# EAGLE board GPS_radiologger_v4 (EAGLE 9.5.1)
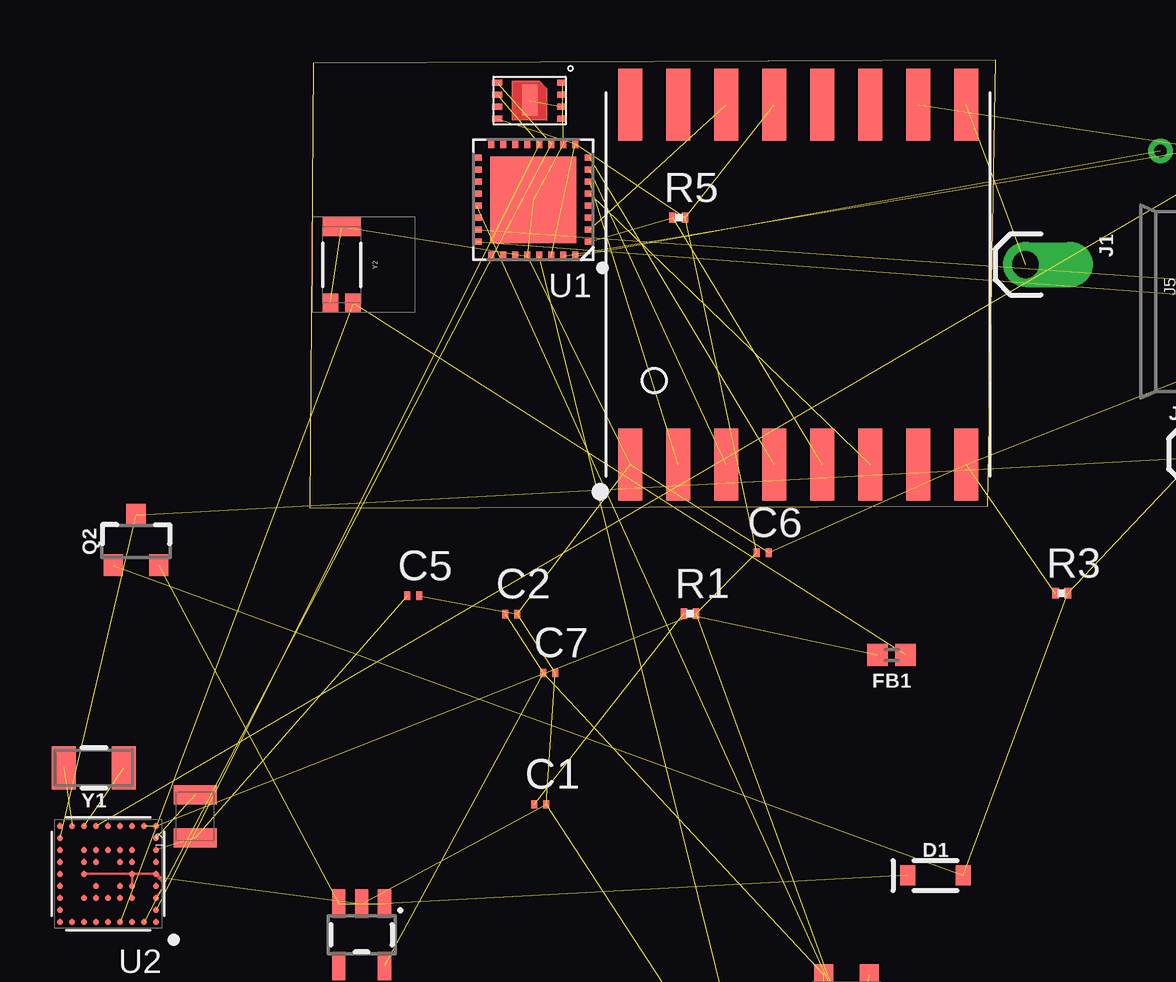
[diagram p0: board, top side]
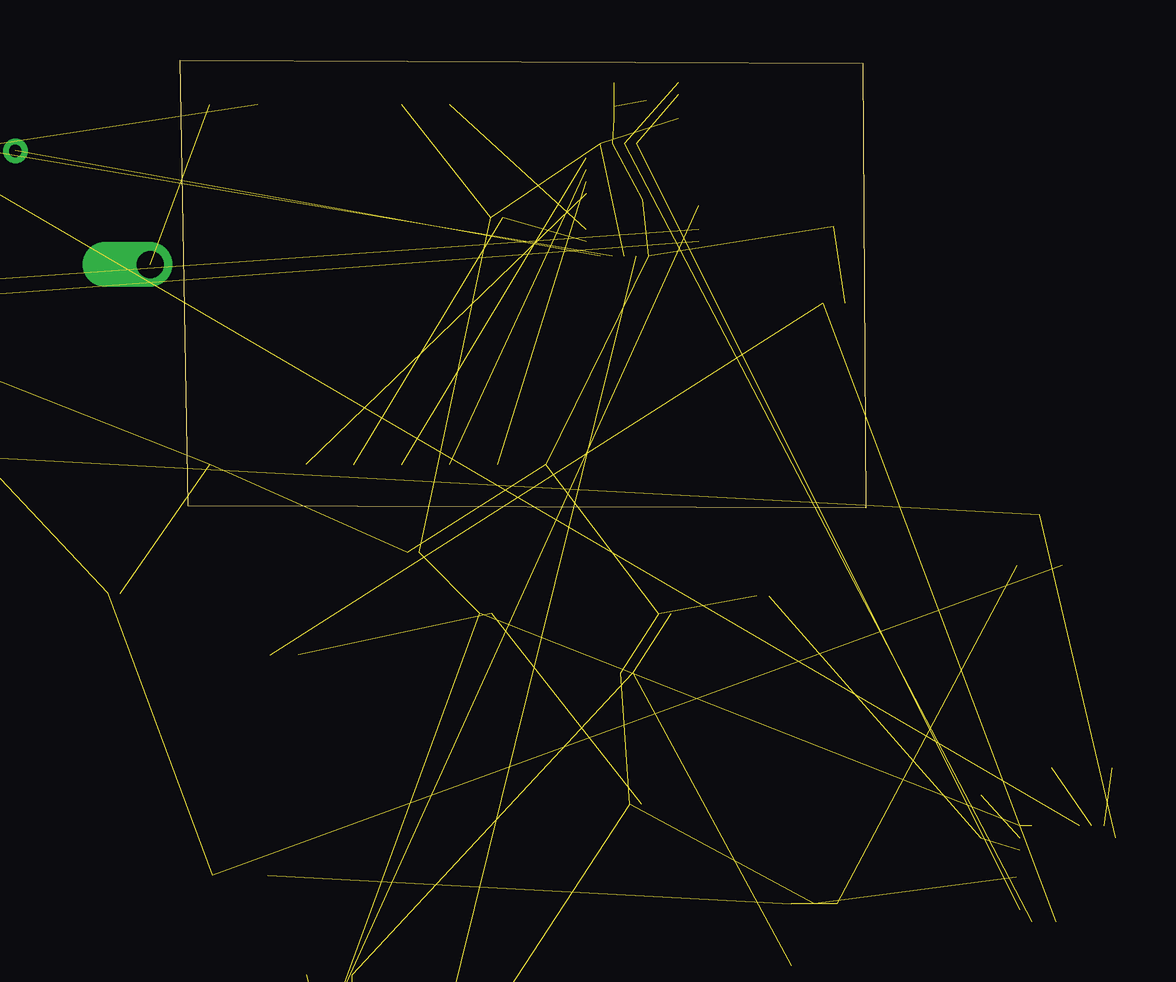
[diagram p1: board, bottom side, seen from below]

Size 28.57 x 18.67 mm. Coordinates in mm from the lower left corner, seen from the top.
Outline: 0,0 28.24,0.07 28.57,18.67 0.14,18.54 0,0
Copper layers (1*16): Top 0.035mm / dielectric 1.5mm / Bottom 0.035mm
Design rules "default *": minimum track width 4mil, minimum drill 0.35mm, track to track 5mil, track to pad 5mil, pad to pad 5mil, via to via 5mil, smd to smd 5mil, copper to edge 20mil, drill to drill 3mil, minimum pad ring 10mil, minimum via ring 8mil, stop-mask expansion 4mil, vias tented up to drill 0mil, thermal gap 10mil
Net classes: 1 vcc: width 0 mm

## Footprints (pad centres in the part's own frame; a part is rotated, then mirrored left to right if it is on the bottom)
C0201 = smd 0.25 x 0.35: 1 -0.25,0; 2 0.25,0
SOD-323 = smd 0.63 x 0.83: A 1.15,0; C -1.15,0
0402 = smd 0.85 x 0.9: 1 -0.58,0; 2 0.58,0
1X01_OFFSET = drill 1.118 pad 1.88 offset: 1 0,0
1X02 = drill 1.016 pad 1.88: 1 0,0; 2 2.54,0
1X04_1.27MM_NO_SILK = drill 0.508 pad 1: 1 0,0; 2 1.27,0; 3 2.54,0; 4 3.81,0
USB-MICROB-PTH-MILL = smd 0.4 x 1.75: D+ 0,0; D- -0.65,0; GND 1.3,0; ID 0.65,0; VBUS -1.3,0 | smd 2 x 1.46: SHIELD -2.9,0.275; SHIELD2 2.9,0.275 | smd 1.425 x 2.5: SHIELD3 -0.963,-2.675; SHIELD4 0.963,-2.675 | smd 1.4 x 2.1 bottom: SHIELD5 -2.731,-2.531; SHIELD7 2.729,-2.531 | smd 1 x 1: SHIELD6 2.7,-2.575 | smd 1.1 x 1.5: SHIELD8 -2.731,-2.731 | smd 1 x 1.3 bottom: SHIELD9 -2.43,0.195; SHIELD10 2.43,0.195
0806 = smd 0.8 x 1.8: 1 -0.9,0; 2 0.9,0
SOT23-3 = smd 0.8 x 0.9: 1 -0.95,-1; 2 0.95,-1; 3 0,1.1
R0201 = smd 0.28 x 0.43: 1 -0.255,0; 2 0.255,0
R0603 = smd 1 x 1.1: 1 -0.85,0; 2 0.85,0
QFN-32_SAMD = smd 0.25 x 0.4: GND 0.21,2.31; GNDANA -1.29,-2.39; PA08 -0.79,-2.39; PA09 -0.29,-2.39; PA10 0.21,-2.39; PA11 0.71,-2.39; PA14 1.21,-2.39; PA15 1.71,-2.39; PA27 1.71,2.31; PA28 0.71,2.31; PA30 -1.29,2.31; PA31 -1.79,2.31; RES 1.21,2.31; VDD -1.79,-2.39; VDDCORE -0.29,2.31; VDDIN -0.79,2.31 | smd 0.4 x 0.25: PA00 -2.39,1.71; PA01 -2.39,1.21; PA02 -2.39,0.71; PA03 -2.39,0.21; PA04 -2.39,-0.29; PA05 -2.39,-0.79; PA06 -2.39,-1.29; PA07 -2.39,-1.79; PA16 2.31,-1.79; PA17 2.31,-1.29; PA18 2.31,-0.79; PA19 2.31,-0.29; PA22 2.31,0.21; PA23 2.31,0.71; PA24 2.31,1.21; PA25 2.31,1.71 | smd 3.6 x 3.6: PAD -0.04,-0.04
UBLOX_ZOE_M8-0-10 = smd 0.25 x 0.25: 1 -1.996,2.004; 2 -1.496,2.004; 3 -0.996,2.004; 4 -0.496,2.004; 5 0.004,2.004; 6 0.504,2.004; 7 1.004,2.004; 8 1.504,2.004; 9 2.004,2.004; 10 2.004,1.504; 11 2.004,1.004; 12 2.004,0.504; 13 2.004,0.004; 14 2.004,-0.496; 15 2.004,-0.996; 16 2.004,-1.496; 17 2.004,-1.996; 18 1.504,-1.996; 19 1.004,-1.996; 20 0.504,-1.996; 21 0.004,-1.996; 22 -0.496,-1.996; 23 -0.996,-1.996; 24 -1.496,-1.996; 25 -1.996,-1.996; 26 -1.996,-1.496; 27 -1.996,-0.996; 28 -1.996,-0.496; 29 -1.996,0.004; 30 -1.996,0.504; 31 -1.996,1.004; 32 -1.996,1.504; 33 -0.996,1.004; 34 -0.496,1.004; 35 0.004,1.004; 36 0.504,1.004; 37 1.004,1.004; 38 1.004,0.004; 39 1.004,-0.496; 40 1.004,-0.996; 41 0.504,-0.996; 42 0.004,-0.996; 43 -0.496,-0.996; 44 -0.996,-0.996; 45 -0.996,-0.496; 46 -0.996,0.004; 47 -0.996,0.504; 48 -0.496,0.504; 49 0.504,0.504; 50 0.504,-0.496; 51 -0.496,-0.496
SOT23-6 = smd 0.55 x 1.35: 1 -0.95,-1.375; 2 0,-1.375; 3 0.95,-1.375; 4 0.95,1.375; 5 0,1.375; 6 -0.95,1.375
RFM95/96/97/98W = smd 3 x 1: 3.3V 7.5,1; !RESET -7.5,-3; ANT 7.5,-7; DIO0 7.5,3; DIO1 7.5,5; DIO2 7.5,7; DIO3 7.5,-3; DIO4 7.5,-1; DIO5 -7.5,-5; GND@1 -7.5,7; GND@2 -7.5,-7; GND@3 7.5,-5; MISO -7.5,5; MOSI -7.5,3; NSS -7.5,-1; SCK -7.5,1
SOT23-5 = smd 0.55 x 1.2: 1 -0.95,-1.3; 2 0,-1.3; 3 0.95,-1.3; 4 0.95,1.3; 5 -0.95,1.3
8-SON_2X3 = smd 0.25 x 0.4: P$1 0.75,-1.35; P$2 0.25,-1.35; P$3 -0.25,-1.35; P$4 -0.75,-1.35; P$5 -0.75,1.35; P$6 -0.25,1.35; P$7 0.25,1.35; P$8 0.75,1.35 | smd 1.27 x 0.635: P$9 0,0
CRYSTAL-SMD-3.2X1.5MM = smd 1 x 1.8: P$1 -1.25,0; P$2 1.25,0
W3011 = smd 0.8 x 0.65: 1 1.6,0.475; 2 1.6,-0.475 | smd 0.8 x 1.6: 3 -1.6,0

## Placement (x,y rotation side)
C1  47 pF  [C0201]  9.6,-12.36 0 top  (outside the outline)
C2  10 uF  [C0201]  8.39,-4.43 0 top  (outside the outline)
C3  10 uF  [C0201]  19.36,-27.32 0 top  (outside the outline)
C4  10 uF  [C0201]  19.37,-28.02 0 top  (outside the outline)
C5  4.7 uF  [C0201]  4.3,-3.67 0 top  (outside the outline)
C6  0.1 uF  [C0201]  18.87,-1.87 0 top
C7  1 uF  [C0201]  9.97,-6.88 0 top  (outside the outline)
D1  1A/23V/620mV  [SOD-323]  26.07,-15.32 0 top  (outside the outline)
FB1  FERRITE_BEAD-120_OHM-0402  [0402]  24.24,-6.13 180 top  (outside the outline)
J1  [1X01_OFFSET]  29.82,10.14 270 top
J2  [1X02]  37.05,2.25 0 top  (outside the outline)
J4  [1X04_1.27MM_NO_SILK]  39.25,14.88 180 top  (outside the outline)
J5  [USB-MICROB-PTH-MILL]  40.27,8.59 270 top  (outside the outline)
L2  2.2uH  [0806]  -4.78,-12.86 90 top  (outside the outline)
Q1  1.1A/60V/600mΩ  [SOT23-3]  22.36,-20.47 180 top  (outside the outline)
Q2  3.1A/30V/105mΩ  [SOT23-3]  -7.24,-1.4 0 top  (outside the outline)
R1  10  [R0201]  15.84,-4.41 0 top  (outside the outline)
R2  30 k  [R0603]  22.47,-28.69 180 top  (outside the outline)
R3  10k  [R0201]  31.32,-3.56 0 top  (outside the outline)
R5  10k  [R0201]  15.38,12.1 0 top
U1  ATSAMD21E18A-U  [QFN-32_SAMD]  9.27,12.8 180 top
U2  UBLOX_ZOE_M8-0-10  [UBLOX_ZOE_M8-0-10]  -8.41,-15.26 180 top  (outside the outline)
U3  TPL5110  [SOT23-6]  22.31,-24.76 0 top  (outside the outline)
U4  RFM95W  [RFM95/96/97/98W]  20.35,9.31 90 top
U5  3.3V  [SOT23-5]  2.16,-17.8 180 top  (outside the outline)
U$2  MB85RC64TA  [8-SON_2X3]  9.16,16.98 90 top
Y1  32.768kHz  [CRYSTAL-SMD-3.2X1.5MM]  -9,-10.84 180 top  (outside the outline)
Y2  W3011  [W3011]  1.33,10.13 270 top

## Library data of the parts
C1-C7 = rcl; SPICEPREFIX: C
D1 = SparkFun-DiscreteSemi; PROD_ID: DIO-11623
FB1 = SparkFun-Coils; MFG_PART: BLM15HB121SN1D; PROD_ID: NDUC-14206
J1 J2 J4 = SparkFun-Connectors
J5 = SparkFun-Connectors; PROD_ID: CONN-13711
L2 = SparkFun-Coils; PROD_ID: NDUC-14257
Q1 = SparkFun-DiscreteSemi; PROD_ID: TRANS-08285
Q2 = SparkFun-DiscreteSemi; PROD_ID: TRANS-11308
R1-R3 R5 = rcl; SPICEPREFIX: R
U1 = SparkFun-IC-Microcontroller; PROD_ID: IC-14428
U2 = SparkFun-GPS; PROD_ID: IC-14251
U3 = SparkFun-IC-Power; PROD_ID: IC-14387
U4 = SparkFun-RF; PROD_ID: IC-13959
U5 = SparkFun-IC-Power; PROD_ID: VREG-12457
U$2 = Fujitsu_FRAM
Y1 = SparkFun-Clocks; PROD_ID: XTAL-13062
Y2 = SparkFun-GPS; PROD_ID: ANT-14304

## Nets
3.3V: C3.1 C6.1 Q1.3 R1.2 R5.2 U1.VDD U1.VDDIN U2.24 U2.25 U4.3.3V U$2.P$5
!INT: U2.43
!RESET: J4.1 U2.20
!SAFEBOOT: U2.34
ANT: FB1.1 U2.4 Y2.1
D13: U1.PA10
D+: J5.D+ U1.PA25
D-: J5.D- U1.PA24
D_SEL: U2.48
DAC: U1.PA02
DELAY/M_DRIVE: R2.1 U3.3
DONE: U1.PA22 U3.4
DRIVE: Q1.1 U3.5
FLASH_CS: U1.PA19
FLASH_MISO: U1.PA18
FLASH_MOSI: U1.PA16
FLASH_SCK: U1.PA17
GND: C1.2 C2.2 C3.2 C4.2 C5.2 C6.2 C7.2 J4.2 J5.GND J5.SHIELD J5.SHIELD2 J5.SHIELD3 J5.SHIELD4 J5.SHIELD5 J5.SHIELD6 J5.SHIELD7 J5.SHIELD8 J5.SHIELD9 J5.SHIELD10 R2.2 R3.1 U1.GND U1.GNDANA U1.PAD U2.1 U2.3 U2.5 U2.7 U2.8 U2.9 U2.10 U2.11 U2.12 U2.17 U2.23 U2.29 U2.31 U2.37 U2.38 U2.39 U2.40 U2.41 U2.44 U2.46 U2.47 U2.49 U3.2 U4.GND@1 U4.GND@2 U4.GND@3 U5.2 U$2.P$1 U$2.P$2 U$2.P$3 U$2.P$4 U$2.P$9 Y2.2 Y2.3
MISO: U1.PA05 U4.MISO
MOSI: U1.PA06 U4.MOSI
N$3: U$2.P$6
N$4: L2.2 U2.26
N$9: C1.1 FB1.2 R1.1
N$10: C4.1 U1.VDDCORE
N$13: C5.1 L2.1 U2.27
N$14: U2.18 Y1.P$2
N$15: U2.19 Y1.P$1
RESET: U1.RES
RFM_ANT: J1.1 U4.ANT
RFM_CS: R5.1 U1.PA00 U4.NSS
RFM_INT: U1.PA01 U4.DIO0
RFM_RST: U1.PA04 U4.!RESET
RXI/MOSI: U2.22
SCK: U1.PA07 U4.SCK
SCL: U1.PA09 U2.32 U$2.P$7
SDA: U1.PA08 U2.2 U$2.P$8
SWCLK: J4.3 U1.PA30
SWDIO: J4.4 U1.PA31
TIMEPULSE: U2.33
TXO/MISO: U2.21
V_BATT: J2.2 Q2.3 U2.16
V_USB: D1.A J2.1 J5.VBUS Q2.1 R3.2
VDD: C2.1 C7.1 Q1.2 U3.1 U3.6 U5.5
VIN: D1.C Q2.2 U5.1 U5.3

## Tracks (layer width: path | path; a pad name or v marks a point on that pad's centre or on a via)
3.3V  (10 unrouted)
!RESET  (1 unrouted)
ANT  (2 unrouted)
D+  (1 unrouted)
D-  (1 unrouted)
DELAY/M_DRIVE  (1 unrouted)
DONE  (1 unrouted)
DRIVE  (1 unrouted)
GND  (36 unrouted)
  Top 0.102: U2.38 U2.46 | U2.46 U2.47 | U2.46 U2.29 -6.41,-15.33 -6.11,-15.64 -6.11,-15.89 -6.41,-16.19 U2.31
  Top 0.152: U2.29 -6.26,-15.41
MISO  (1 unrouted)
MOSI  (1 unrouted)
N$4  (1 unrouted)
N$9  (2 unrouted)
N$10  (1 unrouted)
N$13  (2 unrouted)
N$14  (1 unrouted)
N$15  (1 unrouted)
RFM_ANT  (1 unrouted)
RFM_CS  (2 unrouted)
RFM_INT  (1 unrouted)
RFM_RST  (1 unrouted)
SCK  (1 unrouted)
SCL  (2 unrouted)
SDA  (2 unrouted)
SWCLK  (1 unrouted)
SWDIO  (1 unrouted)
V_BATT  (2 unrouted)
V_USB  (4 unrouted)
VDD  (5 unrouted)
VIN  (3 unrouted)